# Altium PCB KeyFob.PcbDoc
Units mil, origin at the board's own origin, x right, y up, seen from the top; angles counter-clockwise.
Board outline 1385.83 x 1732.28 mil, 2 copper layers (Top Layer, Bottom Layer); 36 components, 19 nets, 110 pads, 40 vias.
Unrouted connection lines stored in the file: 31.
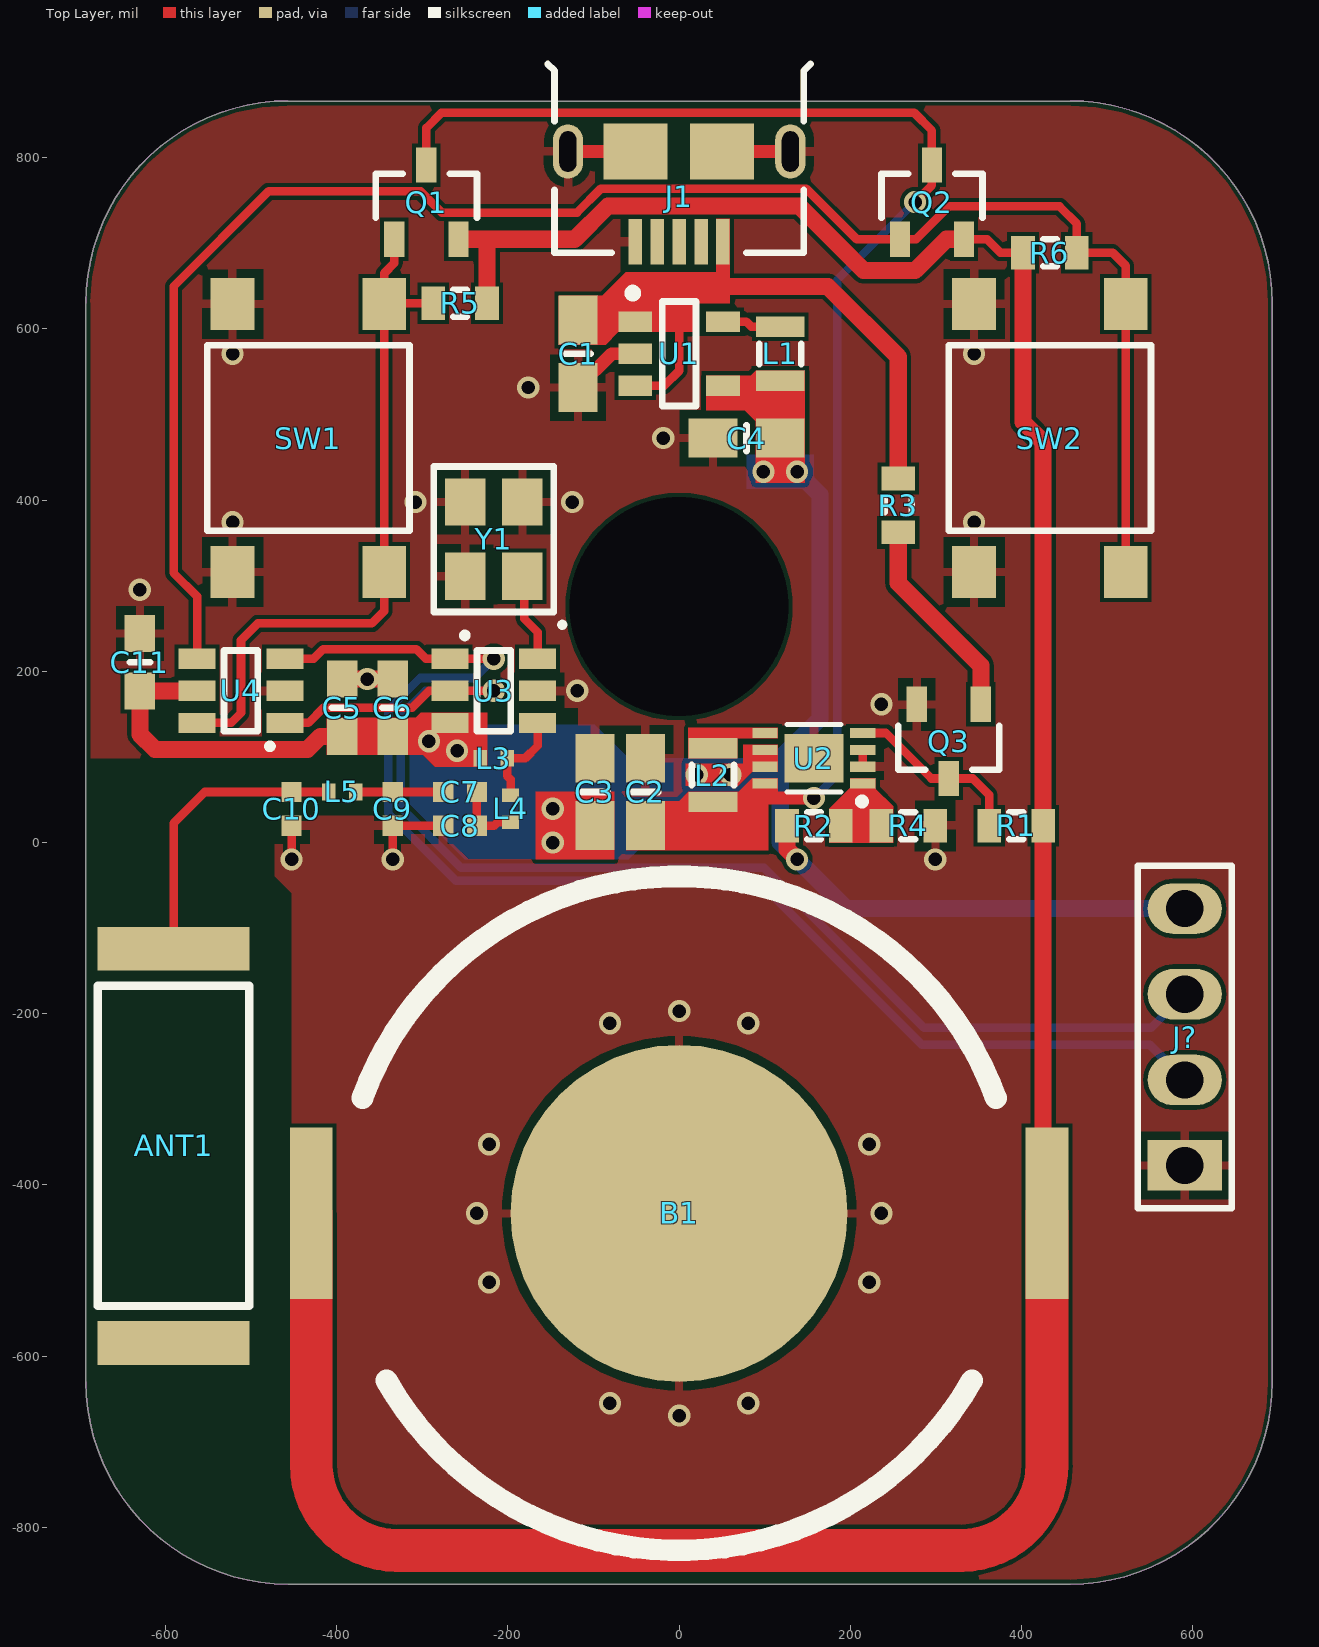
[diagram p0: Top Layer view]
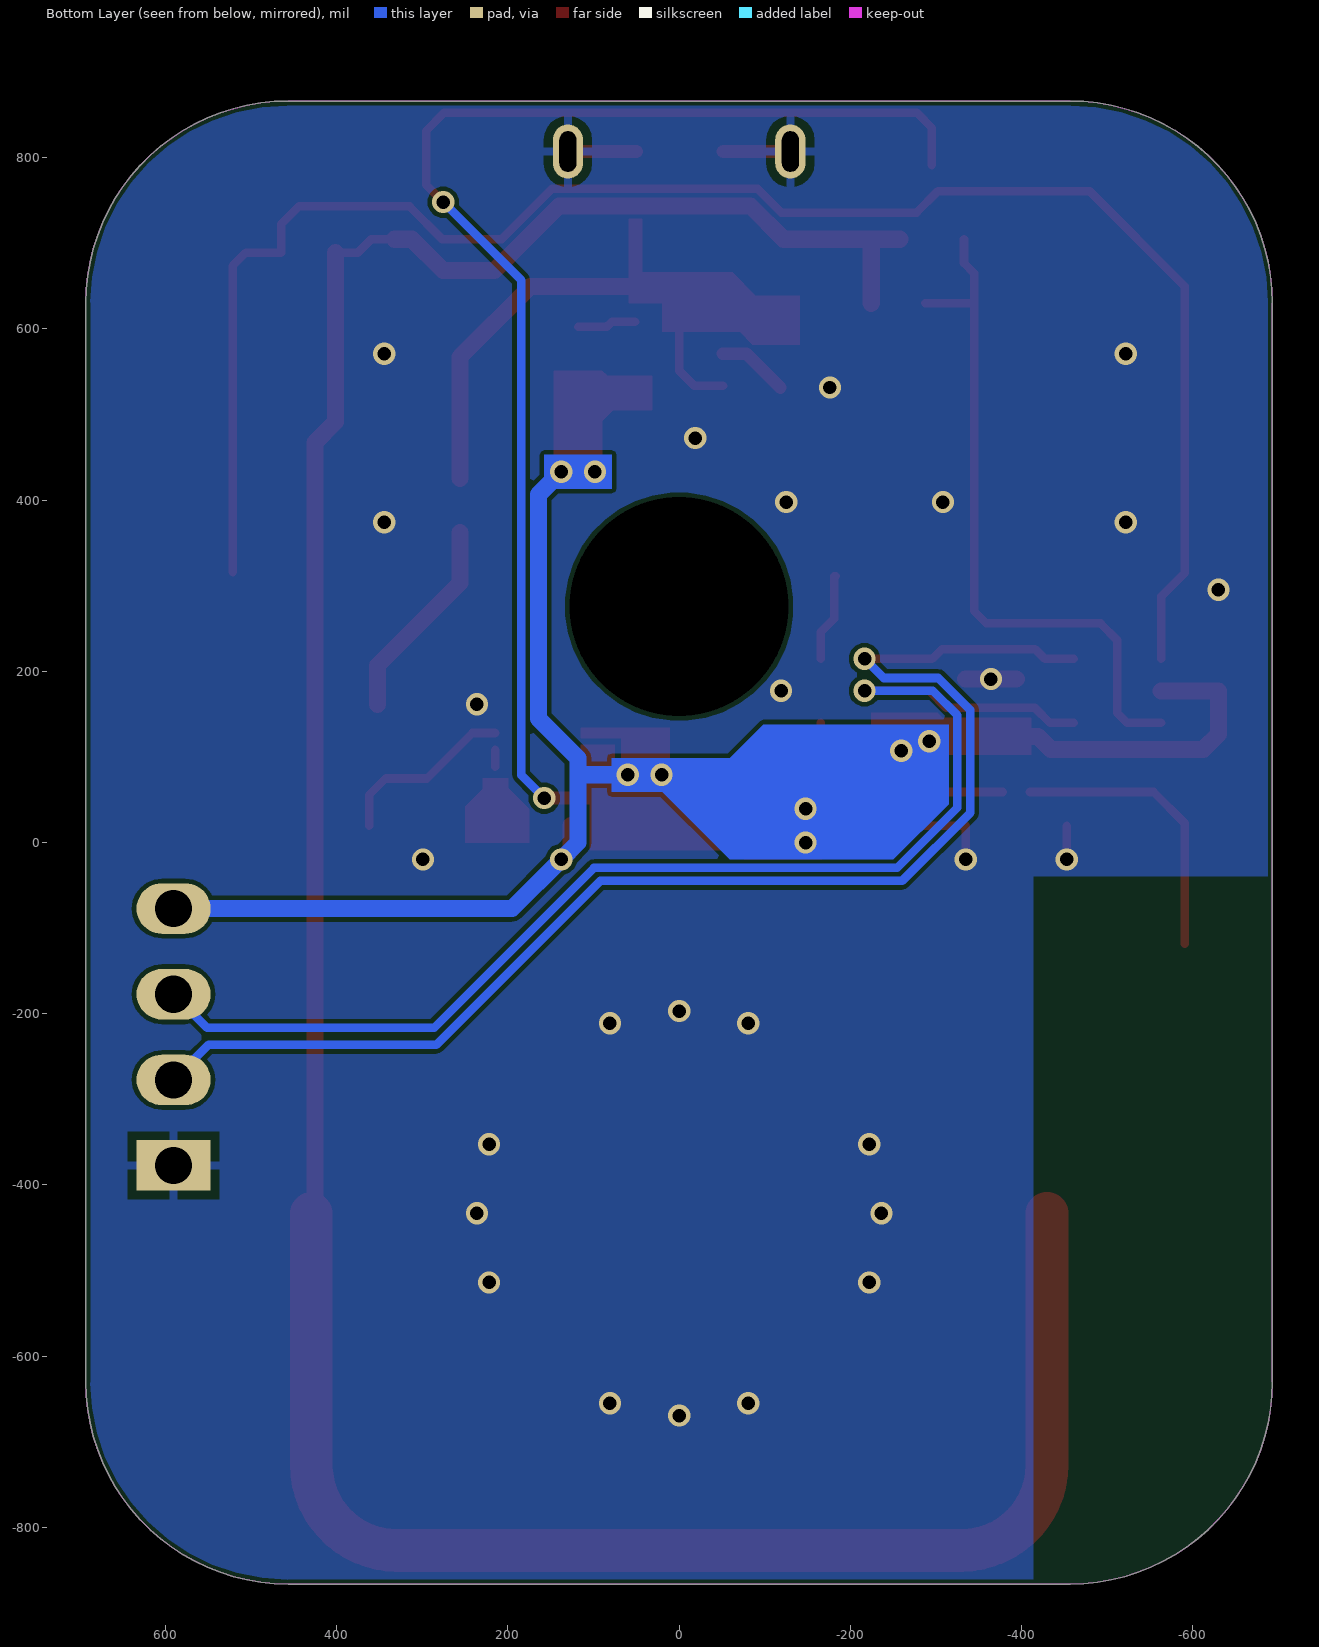
[diagram p1: Bottom Layer view, seen from below]
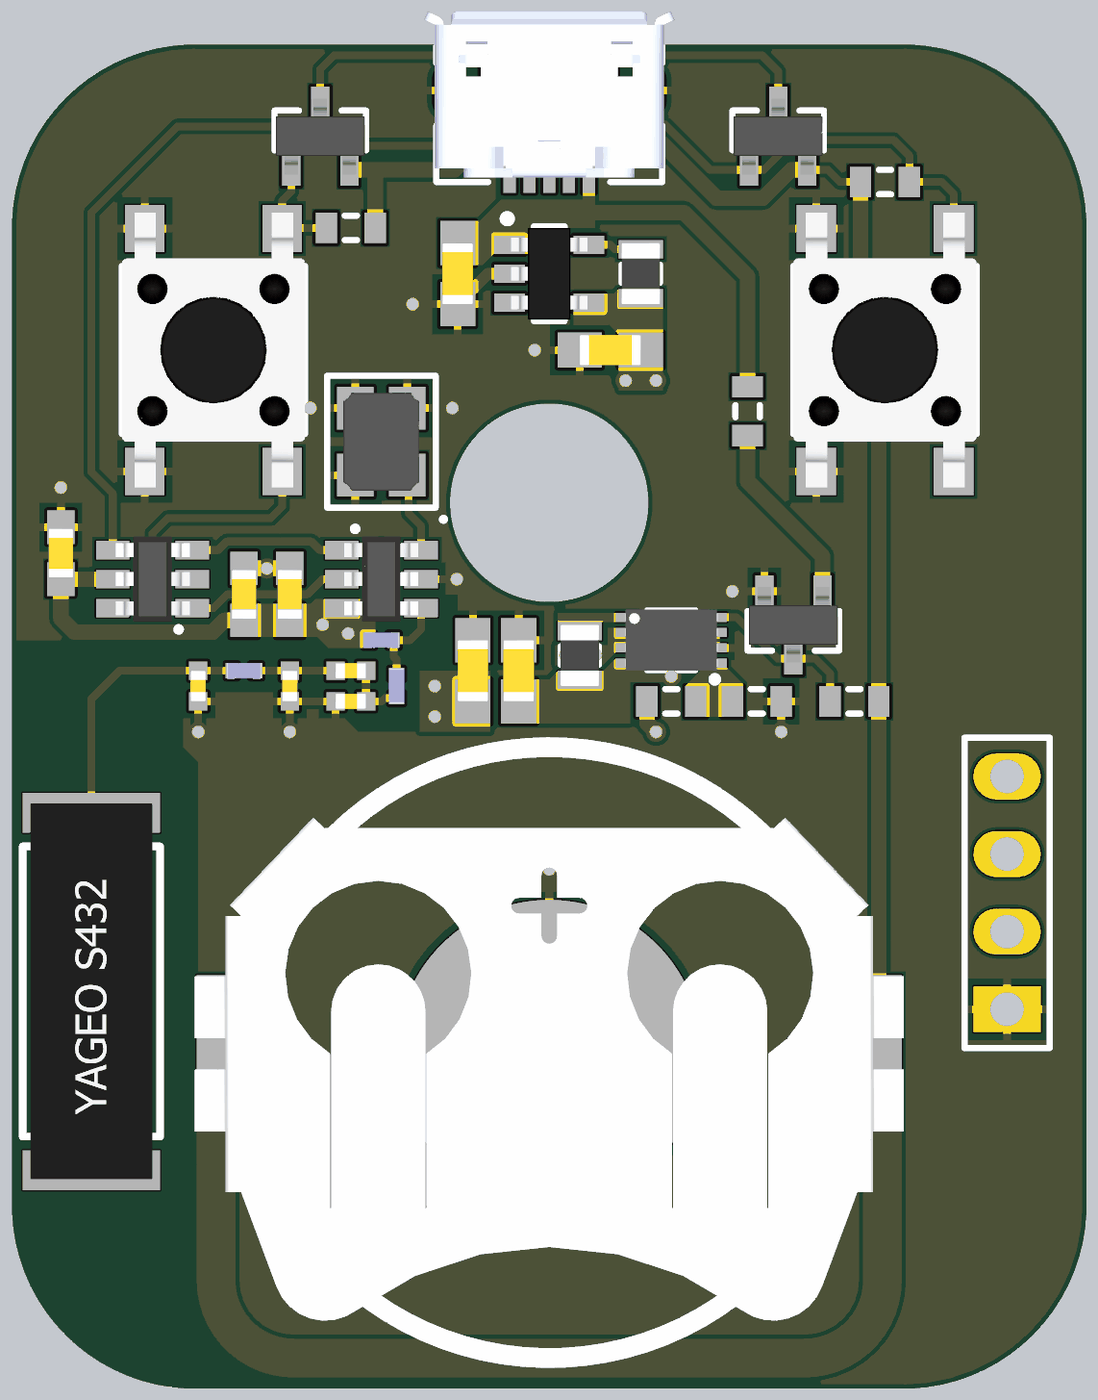
[diagram p2: 3D render of the assembled board from above, using the file's embedded part models]

## Layer stack, top to bottom
Top Solder: solder mask 0.4, Solder Resist, Dk 3.5
Top Layer: signal copper 1.4
Dielectric 1: dielectric 12.6, FR-4, Dk 4.8
Bottom Layer: signal copper 1.4
Bottom Solder: solder mask 0.4, Solder Resist, Dk 3.5

## Board outline
-692.91,-629.92 -692.91,629.92 cw(c-456.69,629.92) -456.69,866.14 456.69,866.14 cw(c456.69,629.92) 692.91,629.92 692.91,-629.92 cw(c456.69,-629.92) 456.69,-866.14 -456.69,-866.14 cw(c-456.69,-629.92)

## Design rules (kind name [scope] priority, off if disabled: settings)
Clearance [All] p1: gap=5 ignorepadtopadclearanceinfootprint=FALSE except(0: Arc-Hole Track-Hole SMDPad-Hole THPad-Hole Via-Hole Fill-Hole Poly-Hole Region-Hole Text-Hole)
PolygonConnect [All] p1: connectstyle=Relief reliefconductorwidth=10 reliefentries=4 polygonreliefangle="90 Angle" airgapwidth=10
RoutingVias [All] p1: holewidth=28 width=50 viastyle="Through Hole" minholewidth=28 minwidth=50 maxholewidth=28 maxwidth=50
SolderMaskExpansion [All] p1: expansion=4 istentingtop=FALSE
Width [All] p1: maxlimit=100 minlimit=5 preferedwidth=10
30 further rules are at their usual default settings.

## Components (designator, comment, footprint, x,y, rotation, side; value= is the part's Value field where it differs from the comment)
ANT1 "433MHz" Ant,Chip,SMD -590.55,-354.33 r270 top
B1 "CR2032" Holder,Cell,CR2032,PCB,SMD 0,-433.07 r180 top locked
C1 "10uF" Cap,SMD,0805 -118.11,570.87 r90 top
C2 "10uF" Cap,SMD,0805 -39.37,59.06 r270 top
C3 "10uF" Cap,SMD,0805 -98.43,59.06 r270 top
C4 "10uF" Cap,SMD,0805 78.74,472.44 r0 top
C5 "4.7nF" Cap,SMD,0603 -393.7,157.48 r270 top
C6 "470pF" Cap,SMD,0603 -334.65,157.48 r270 top
C7 "5.6pF" Cap,SMD,0402 -255.9,59.06 r0 top
C8 "6.8pF" Cap,SMD,0402 -255.9,19.69 r0 top
C9 "8.2pF" Cap,SMD,0402 -334.65,39.37 r90 top
C10 "8.2pF" Cap,SMD,0402 -452.76,39.37 r90 top
C11 "100nF" Cap,SMD,0603 -629.92,210.63 r270 top
J1 "USB" CONN,USB,MICROB,SMD 0,807.09 r180 top
J? "Term,Header,4 Pin,Top,2.54mm" Term,Header,4Pin,2.54mm 590.55,-277.17 r90 top
L1 "4.7uH" IND,0805 118.11,570.87 r270 top
L2 "4.7uH" IND,0805 39.37,78.74 r90 top
L3 "330nH" ind,0402 -216.54,98.43 r0 top
L4 "22nH" ind,0402 -196.85,39.37 r270 top
L5 "18nH" ind,0402 -393.7,59.06 r180 top
Q1 "FDN340P" SOT23-3 -295.28,748.03 r90 top
Q2 "FDN340P" SOT23-3 295.28,748.03 r90 top
Q3 "MMBT3904LT1G" SOT23-3 314.96,118.11 r270 top
R1 "10k" RES,0603 393.7,19.68 r0 top
R2 "976k" RES,0603 157.48,19.68 r0 top
R3 "10k" RES,0603 255.91,393.7 r270 top
R4 "562k" RES,0603 267.72,19.68 r180 top
R5 "10k" RES,0603 -255.91,629.92 r180 top
R6 "10k" RES,0603 433.07,688.98 r0 top
SW1 "Switch" Switch,Tactile,SPST-NO,SMD -433.07,472.44 r90 top
SW2 "Switch" Switch,Tactile,SPST-NO,SMD 433.07,472.44 r90 top
U1 "TPS62203DBVR" SOT23-5 0,570.87 r0 top
U2 "MCP1640" IC,DFN,2x3mm,P0.5,SMD 157.48,98.43 r180 top
U3 "MICR114" SOT23-6 -216.54,177.17 r0 top
U4 "ATTINY5" SOT23-6 -511.81,177.17 r180 top
Y1 "13.56MHz" "XTAL,SMD,4 Pin" -216.54,354.33 r90 top

## Footprints (in the part's own frame and the unit in brackets; to place one, negate y for a bottom-side part, rotate by r counter-clockwise, add the part's x,y. Pads: shape width x height; smd on the part's side, far side on the other; paste and mask are expansions set on the pad)
Ant,Chip,SMD [mm] "PulseLarsen Antennas ANT1204F002R0433A"
  rect 1.3x4.5 smd mask+0.05: 0(5.85,0) 1(-5.85,0)
  silkscreen extent -4.75,-2.25 4.75,2.25, body extent -6.15,-2 6.15,2, height 1.6
Cap,SMD,0402 [mm] "KEMET C0402C100K5GACTU"
  rect 0.6x0.6 smd: 1(-0.5,0) 2(0.5,0)
  body extent -0.5,-0.25 0.5,0.25, height 0.5
Cap,SMD,0603 [mm] "KEMET C0603C104Z3VACTU"
  rect 1.1x0.9 smd: 1(-0.85,0) 2(0.85,0)
  silkscreen extent 0,-0.3 0,0.3, body extent -0.8,-0.4 0.8,0.4, height 0.5
Cap,SMD,0805 [mm] "KEMET C0805C102K5RACTU"
  rect 1.45x1.15 smd: 1(-1,0) 2(1,0)
  silkscreen extent 0,-0.38 0,0.38, body extent -1,-0.5 1,0.5, height 1.2
CONN,USB,MICROB,SMD [mm] "Amphenol ICC 10118193-0001LF"
  rrect100% 0.9x1.6 hole 1.2 slot 0.5 at 0 deg: 0(-3.3,0) 0(3.3,0)
  rect 1.9x1.651 smd: 0(-1.27,0) 0(1.3,0)
  rect 0.4x1.35 smd: 1(-1.3,2.675) 2(-0.65,2.675) 3(0,2.675) 4(0.65,2.675) 5(1.3,2.675)
  silkscreen extent -3.9,-2.6 3.9,3, body extent -4.1,-2.58 4.1,2.85, height 2.68
Holder,Cell,CR2032,PCB,SMD [mm] "Adam Tech BH-67A-5"
  rect 1.27x5.08 smd mask+0.05: 1(-10.915,0) 1(10.915,0)
  round 10 smd mask+0.05: 2(0,0)
  silkscreen extent -9.4,-10 9.4,10, body extent -11.62,-7.7 11.62,8.78, height 4.05
IC,DFN,2x3mm,P0.5,SMD [mm] "Microchip MCP1640"
  rect 0.75x0.3 smd mask+0.05: 1(-1.45,0.75) 2(-1.45,0.25) 3(-1.45,-0.25) 4(-1.45,-0.75) 5(1.45,-0.75) 6(1.45,-0.25) 7(1.45,0.25) 8(1.45,0.75)
  rect 1.75x1.45 smd mask+0.05: 9(0,0)
  silkscreen extent -1.51,-1 0.8,1.36, body extent -1.52,-1.01 1.52,0.99, height 0.9
ind,0402 [mm] "Murata LQW15AN9N1G00D"
  rect 0.4x0.5 smd: 1(-0.4,0) 2(0.4,0)
  body extent -0.56,-0.26 0.56,0.26, height 0.65
IND,0805 [mm] "Taiyo Yuden LBR2012T100K"
  rect 0.6x1.45 smd mask+0.05: 1(-0.8,0) 2(0.8,0)
  silkscreen extent -0.3,-0.63 0.3,0.63, body extent -1,-0.62 1,0.63, height 0.49
RES,0603 [mm] "Yageo RC0603FR-0710KL"
  rect 0.7x1 smd: 1(-0.8,0) 2(0.8,0)
  silkscreen extent -0.2,-0.4 0.2,0.4, body extent -0.8,-0.4 0.8,0.4, height 0.45
SOT23-3 [mm] "Texas Instruments TL431BIDBZR"
  rect 1.05x0.6 smd: 1(-1.1,0.95) 2(-1.1,-0.95) 3(1.1,0)
  silkscreen extent -0.46,-1.5 0.84,1.5, body extent -1.25,-1.46 1.23,1.46, height 1
SOT23-5 [mm] "Texas Instruments TPS62203DBVR"
  rect 1x0.6 smd: 1(-1.3,0.95) 2(-1.3,0) 3(-1.3,-0.95) 4(1.3,-0.95) 5(1.3,0.95)
  silkscreen extent -1.5,-1.55 0.5,1.92, body extent -1.25,-1.5 1.25,1.5, height 1.11
SOT23-6 [mm] "Texas Instruments SN74LVC1G18DBVR"
  rect 1.1x0.6 smd mask+0.05: 1(-1.3,0.95) 2(-1.3,0) 3(-1.3,-0.95) 4(1.3,-0.95) 5(1.3,0) 6(1.3,0.95)
  silkscreen extent -0.9,-1.2 0.5,1.69, body extent -1.22,-1.4 1.2,1.4, height 1.09
Switch,Tactile,SPST-NO,SMD [mm] "C&K PTS645SK43SMTR92 LFS"
  rect 1.55x1.3 smd mask+0.05: 1(-3.975,2.25) 2(3.975,2.25) 3(-3.975,-2.25) 4(3.975,-2.25)
  silkscreen extent -2.75,-3 2.75,3, body extent -4.5,-3 4.5,3, height 4.3
Term,Header,4Pin,2.54mm [mm] "Amphenol ICC 10082627-404HLF"
  rect 1.5x2.2 hole 1.1 mask+0.05: 1(-2.54,0)
  oval 1.5x2.2 hole 1.1 mask+0.05: 2(0,0) 3(2.54,0) 4(5.08,0)
  silkscreen extent -3.81,-1.4 6.35,1.4
"XTAL,SMD,4 Pin" [mm] "Abracon ABM8G-12.000MHZ-4Y-T3"
  rect 1.4x1.2 smd: 1(-1.1,-0.85) 2(1.1,-0.85) 3(1.1,0.85) 4(-1.1,0.85)
  silkscreen extent -2.59,-2.08 2.16,1.78, body extent -1.6,-1.24 1.6,1.24, height 0.99

## Part data
ANT1: library part Ant,433MHz,Chip,SMD, "433MHz - Chip RF Antenna 419MHz ~ 447MHz 0.79dBi Solder Surface Mount", Manufacturer=Yageo, Manufacturer Part Number=ANT1204F002R0433A, Vendor Part Number=311-1570-1-ND, CreatedBy="Judd Foster", HelpURL=https://www.yageo.com/upload/media/product/productsearch/datasheet/wireless/An_SMD_UHF_433_1204_0.pdf, Vendor=Digikey
B1: library part Holder,Cell,CR2032,PCB,SMD, "Battery Retainer Coin, 20.0mm 1 Cell SMD (SMT) Tab", Manufacturer="Keystone Electronics", Manufacturer Part Number=3034, Vendor Part Number=36-3034-ND, CreatedBy="Judd Foster", HelpURL=https://www.keyelco.com/userAssets/file/M65p9.pdf, Vendor=Digikey
C1 C2 C3 C4: library part CAP,Cer,10uF,10VDC,X5R,0805, "CAP CER 10UF 10V X5R 0805", Manufacturer=KEMET, Manufacturer Part Number=C0805C106K8PACTU, Vendor Part Number=399-4925-1-ND, CreatedBy="Judd Foster", HelpURL=https://content.kemet.com/datasheets/KEM_C1006_X5R_SMD.pdf, Vendor=Digikey
C5: library part CAP,Cer,4.7nF,50VDC,X7R,0603, "CAP CER 4700PF 50V X7R 0603", Manufacturer=KEMET, Manufacturer Part Number=C0603C472K5RACTU, Vendor Part Number=399-1087-1-ND, CreatedBy="Judd Foster", HelpURL=https://content.kemet.com/datasheets/KEM_C1002_X7R_SMD.pdf, Vendor=Digikey
C6: library part CAP,Cer,470pF,100VDC,X7R,0603, "470 pF ±10% 100V Ceramic Capacitor X7R 0603 (1608 Metric)", Manufacturer="AVX Corporation", Manufacturer Part Number=06031C471K4T2A, Vendor Part Number=478-9373-1-ND, CreatedBy="Judd Foster", HelpURL=https://datasheets.avx.com/AutoMLCC.pdf, Vendor=Digikey
C7: library part CAP,Cer,5.6pF,50VDC,C0G/NP0,0402, "5.6 pF ±0.1pF 50V Ceramic Capacitor C0G, NP0 0402 (1005 Metric)", Manufacturer="AVX Corporation", Manufacturer Part Number=04025A5R6BAT2A, Vendor Part Number=478-11363-1-ND, CreatedBy="Judd Foster", HelpURL=https://datasheets.avx.com/C0GNP0-Dielectric.pdf, Vendor=Digikey
C8: library part CAP,Cer,6.8pF,50VDC,C0G/NP0,0402, "±0.05pF 50V Ceramic Capacitor C0G, NP0 0402 (1005 Metric)", Manufacturer="Murata Electronics", Manufacturer Part Number=GJM1555C1H6R8WB01D, Vendor Part Number=490-14447-1-ND, CreatedBy="Judd Foster", HelpURL=https://search.murata.co.jp/Ceramy/image/img/A01X/G101/ENG/GJM1555C1H6R8WB01-01.pdf, Vendor=Digikey
C9 C10: library part CAP,Cer,8.2pF,50VDC,C0G/NP0,0402_1, "8.2 pF ±0.05pF 50V Ceramic Capacitor C0G, NP0 0402 (1005 Metric)", Manufacturer="Murata Electronics", Manufacturer Part Number=GJM1555C1H8R2WB01D, Vendor Part Number=490-11241-1-ND, CreatedBy="Judd Foster", HelpURL=https://search.murata.co.jp/Ceramy/image/img/A01X/G101/ENG/GJM1555C1H8R2WB01-01.pdf, Vendor=Digikey
C11: library part CAP,Cer,100nF,25VDC,Y5V,0603, "CAP CER 0.1UF 25V Y5V 0603", Manufacturer=KEMET, Manufacturer Part Number=C0603C104Z3VACTU, Vendor Part Number=399-1100-1-ND, CreatedBy="Judd Foster", HelpURL=https://content.kemet.com/datasheets/KEM_C1005_Y5V_SMD.pdf, Vendor=Digikey
J1: library part Conn,USB.Micro_B,SMD, "USB - micro B USB 2.0 Receptacle Connector 5 Position Surface Mount, Right Angle; Through Hole", Manufacturer="Amphenol ICC (FCI)", Manufacturer Part Number=10118193-0001LF, Vendor Part Number=609-4616-1-ND, CreatedBy="Judd Foster", HelpURL=https://cdn.amphenol-icc.com/media/wysiwyg/files/documentation/datasheet/inputoutput/io_usb_micro.pdf, Vendor=Digikey
J?: "Connector Header Through Hole 4 position 0.100\" (2.54mm)", Manufacturer="Amphenol ICC (FCI)", Manufacturer Part Number=10082627-404HLF, Vendor Part Number=609-10082627-404HLF-ND, Created By="Judd Foster", HelpURL=https://cdn.amphenol-icc.com/media/wysiwyg/files/drawing/10082627.pdf, Vendor=Digikey
L1 L2: library part IND,4.7uH,80mA,Multilayer,0805, "4.7 µH Shielded Multilayer Inductor 80 mA 300mOhm 0805 (2012 Metric)", Manufacturer="TDK Corporation", Manufacturer Part Number=MLZ2012E4R7MT000, Vendor Part Number=445-3169-1-ND, CreatedBy="Judd Foster", HelpURL=https://product.tdk.com/en/system/files?file=dam/doc/product/inductor/inductor/smd/catalog/inductor_commercial_decoupling_mlz2012_en.pdf, Vendor=Digikey
L3: library part IND,330nH,300mA,Multilayer,0402, "330 nH Shielded Multilayer Inductor 300 mA 600mOhm Max 0402 (1005 Metric)", Manufacturer="Murata Electronics", Manufacturer Part Number=LQB15NNR33M10D, Vendor Part Number=490-17863-1-ND, CreatedBy="Judd Foster", HelpURL=https://search.murata.co.jp/Ceramy/image/img/P02/JELF243B-0045.pdf, Vendor=Digikey
L4: library part IND,22nH,800mA,Wirewound,0402, "22 nH Unshielded Wirewound Inductor 800 mA 160mOhm 0402 (1005 Metric) -", Manufacturer="Delta Electronics/Components", Manufacturer Part Number=0402HP-220EGTS, Vendor Part Number=2035-1087-1-ND, CreatedBy="Judd Foster", HelpURL=https://www.deltaww.com/filecenter/Products/download/04/0402/0402HP.pdf, Vendor=Digikey
L5: library part IND,18nH,370mA,Wirewound,0402, "18 nH Unshielded Wirewound Inductor 370 mA 270mOhm 0402 (1005 Metric) -", Manufacturer="Delta Electronics/Components", Manufacturer Part Number=0402HM-180EGTS, Vendor Part Number=2035-1047-1-ND, CreatedBy="Judd Foster", HelpURL=https://filecenter.deltaww.com/Products/download/04/0402/0402HM.pdf, Vendor=Digikey
Q1 Q2: library part "MOSFET,P Ch,20V,2A", "P-Channel 20V 2A (Ta) 500mW (Ta) Surface Mount SuperSOT-3", Manufacturer="ON Semiconductor", Vendor Part Number=FDN340PCT-ND, CreatedBy="Judd Foster", HelpURL=https://www.onsemi.com/pub/Collateral/FDN340P-D.PDF, Manufacturer Part Number=FDN340P, Vendor=Digikey
Q3: library part Trans,NPN,40V,200mA,SMD, "TRANS NPN 40V 0.2A SOT23", Manufacturer="ON Semiconductor", Vendor Part Number=MMBT3904LT1GOSCT-ND, CreatedBy="Judd Foster", HelpURL=https://www.onsemi.com/pub/Collateral/MMBT3904LT1-D.PDF, Manufacturer Part Number=MMBT3904LT1G, Vendor=Digikey
R1 R3 R5 R6: library part RES,10k,1%,0.1W,0603, "RES SMD 10K OHM 1% 1/10W 0603", Manufacturer=Yageo, Manufacturer Part Number=RC0603FR-0710KL, Vendor Part Number=311-10.0KHRCT-ND, CreatedBy="Judd Foster", HelpURL=https://www.yageo.com/upload/media/product/productsearch/datasheet/rchip/PYu-RC_Group_51_RoHS_L_10.pdf, Vendor=Digikey
R2: library part RES,976k,1%,0.1W,0603, "976 kOhms ±1% 0.1W, 1/10W Chip Resistor 0603 (1608 Metric) Automotive AEC-Q200 Thick Film", Manufacturer="Stackpole Electronics Inc", Manufacturer Part Number=RMCF0603FT976K, Vendor Part Number=RMCF0603FT976KCT-ND, CreatedBy="Judd Foster", HelpURL=https://www.seielect.com/catalog/sei-rmcf_rmcp.pdf, Vendor=Digikey
R4: library part RES,562k,1%,0.1W,0603, "562 kOhms ±1% 0.1W, 1/10W Chip Resistor 0603 (1608 Metric) Automotive AEC-Q200 Thick Film", Manufacturer="Stackpole Electronics Inc", Manufacturer Part Number=RMCF0603FT562K, Vendor Part Number=RMCF0603FT562KCT-ND, CreatedBy="Judd Foster", HelpURL=https://www.seielect.com/catalog/sei-rmcf_rmcp.pdf, Vendor=Digikey
SW1 SW2: library part Switch,Tactile,SPST-NO,SMD,H5.0, "Tactile Switch SPST-NO Top Actuated Surface Mount", Manufacturer=C&K, Manufacturer Part Number="PTS645SK50SMTR92 LFS", Vendor Part Number=CKN9087CT-ND, CreatedBy="Judd Foster", HelpURL=https://dznh3ojzb2azq.cloudfront.net/products/Tactile/PTS645/documents/datasheet.pdf, Vendor=Digikey
U1: "IC REG BUCK 3.3V 300MA SOT23-5", Manufacturer="Texas Instruments", Vendor Part Number=296-39452-1-ND, CreatedBy="Judd Foster", HelpURL=http://www.ti.com/lit/ds/symlink/tps62203.pdf, Manufacturer Part Number=TPS62203DBVR, Vendor=Digikey
U2: library part MCP1640CT-I/MC, "AVR series Microcontroller IC 8-Bit 12MHz 512B (256 x 16) FLASH SOT-23-6", Manufacturer="Microchip Technology", Vendor Part Number=MCP1640CT-I/MCCT-ND, CreatedBy="Judd Foster", HelpURL=https://ww1.microchip.com/downloads/en/DeviceDoc/20002234D.pdf, Manufacturer Part Number=MCP1640CT-I/MC, Vendor=Digikey
U3: library part MICRF114T-I/OT, "RF Transmitter - 285MHz ~ 445MHz 13dBm 115.2kbps - Antenna SOT-23-6", Manufacturer=Microchip, Vendor Part Number=MICRF114T-I/OTCT-ND, CreatedBy="Judd Foster", HelpURL=https://ww1.microchip.com/downloads/en/DeviceDoc/50002416A.pdf, Manufacturer Part Number=MICRF114T-I/OT, Vendor=Digikey
U4: library part ATTINY5-TSHR, "AVR series Microcontroller IC 8-Bit 12MHz 512B (256 x 16) FLASH SOT-23-6", Manufacturer="Microchip Technology", Vendor Part Number=ATTINY5-TSHRCT-ND, CreatedBy="Judd Foster", HelpURL=https://ww1.microchip.com/downloads/en/DeviceDoc/Atmel-8127-AVR-8-bit-Microcontroller-ATtiny4-ATtiny5-ATtiny9-ATtiny10_Datasheet-Summary.pdf, Manufacturer Part Number=ATTINY5-TSHR, Vendor=Digikey
Y1: library part XTAL,13.56MHz,18pF,SMD, "±20ppm Crystal 18pF 4-SMD, No Lead", Manufacturer="NDK America, Inc.", Manufacturer Part Number=NX3225SA-13.56M-STD-CSR-3, Vendor Part Number=644-1235-1-ND, CreatedBy="Judd Foster", HelpURL=https://media.digikey.com/pdf/Data%20Sheets/NDK%20PDFs/NX3225SA_STD-CSR-3.pdf, Vendor=Digikey

## Free pads (board coordinates)
  round 0 hole 255.91 unplated mask+1.97: 0(0,275.59)

## Via types
v1: diameter 25.98, hole 15.75, Top Layer to Bottom Layer, tented both sides, 40 vias

## Nets (pads, with @x,y where several pads share a name; then routed paths per layer and width w, separated by ;. In a path a pad name is that pad's centre, name@x,y a point inside that pad or via, vN(x,y) a via of type N, cw(c..) or ccw(c..) an arc to the next point about the centre after c; other vN are vias at no path point)
3V3: C3.2 C4.2 C5.2 C6.2 C11.2 J?.4 L1.2 L3.1 R2.1 U1.4 U2.6 U2.7 U3.3 U4.5 | length 1437.6
  Top Layer w20: U4.5 C11.2 -629.92,126.51 -612.26,108.86 -434,108.86 -418.84,124.02 C5.2 ; R2.1 125.98,-7.87 v1(137.8,-19.68)
  Bottom Layer w20: v1(59.95,79.22) 118.11,79.22 ; v1(137.8,433.07) 164.5,406.36 164.5,144.82 118.11,98.43 118.11,79.22 ; J?.4 195.28,-77.17 v1(137.8,-19.68) 118.11,0 118.11,79.22
  other v1: -147.64,0 -147.64,39.37 20.57,79.22 -259.41,107.1 -292.25,118.4 98.43,433.07
GND: B1.2 C1.1 C2.1 C3.1 C4.1 C5.1 C6.1 C8.1 C9.1 C10.1 C11.1 J1.0 J1.5 J?.1 Q3.2 R4.1 SW1.1 SW1.2 SW2.1 SW2.2 U1.2 U2.2 U2.3 U2.9 U3.5 U4.2 Y1.2 Y1.3 Y1.4 | length 458.4
  Top Layer w10: v1(-452.76,-19.68) C10.1 ; v1(-334.65,-19.68) C9.1 C8.1 ; U2.2 U2.3
  Top Layer w15: J1.0@-129.92,807.09 J1.0@-51.18,807.09 ; C1.1 -78.74,570.87 U1.2 ; J1.0@50,807.09 J1.0@129.92,807.09
  Top Layer w20: C5.1 v1(-364.17,190.94) C6.1
  other v1: 0,-669.29 -80.79,-655.05 80.79,-655.05 -221.97,-513.86 221.97,-513.86 -236.22,-433.07 236.22,-433.07 -221.97,-352.28 221.97,-352.28 -80.79,-211.1 80.79,-211.1 0,-196.85 299.21,-19.68 236.22,161.42 -119.09,177.17 -629.92,295.28 -521.65,374.02 344.49,374.02 -308.07,397.64 -125,397.64 -18.7,472.44 -176.18,531.5 -521.65,570.87 344.49,570.87
NetANT1_1: ANT1.1 C10.2 L5.2 | length 336.9
  Top Layer w10: ANT1.1@-590.55,-118.11 -590.55,22.62 -554.11,59.06 C10.2 L5.2
NetC2_2: C2.2 L2.1 Q1.3 Q2.3 U2.8 | length 1562.5
  Top Layer w10: Q1.3 -295.28,834.77 -277.72,852.33 274.5,852.33 295.28,831.56 Q2.3 295.28,767.72 v1(275.59,748.03)
  Top Layer w15: 81.6,51.89 v1(157.48,51.89)
  Bottom Layer w10: v1(157.48,51.89) 184.5,78.91 184.5,656.94 v1(275.59,748.03)
NetC7_1: C7.1 C9.2 L5.1 | length 102.4
  Top Layer w10: L5.1 C9.2 C7.1
NetC7_2: C7.2 C8.2 L4.2 | length 80.4
  Top Layer w10: C7.2 C8.2 -216.29,19.68 -212.35,23.62 L4.2
NetL1_1: L1.1 U1.5 | length 69.4
  Top Layer w10: U1.5 78.6,608.27 84.5,602.36 L1.1
NetL2_2: L2.2 U2.5
NetL3_2: L3.2 L4.1 U3.4 | length 113.3
  Top Layer w10: L4.1 -196.85,73.63 -200.79,77.57 L3.2 -179.74,98.43 -165.35,112.81 U3.4
NetQ3_1: Q3.1 R3.2 | length 240.7
  Top Layer w20: R3.2 255.91,303.16 352.36,206.71 Q3.1
NetR2_2: R2.2 R4.2 U2.1
NetU3_6: U3.6 Y1.1 | length 104.9
  Top Layer w10: Y1.1 -181.1,311.02 -181.1,261.56 -165.35,245.81 U3.6
SCK: J?.2 U3.1 U4.3 | length 1581.3
  Top Layer w10: U4.3 -427.09,214.57 -415.96,225.7 -306.92,225.7 -295.79,214.57 U3.1 v1(-216.54,214.57)
  Bottom Layer w10: v1(-216.54,214.57) -238.94,192.17 -302.62,192.17 -339.96,154.82 -339.96,59.06 -339.96,34.63 -260.65,-44.68 92.02,-44.68 283.55,-236.22 549.61,-236.22 J?.2
SDI: J?.3 U3.2 U4.1 | length 1526
  Top Layer w10: U4.1 -433.11,139.76 -415.39,157.48 -312.06,157.48 -292.38,177.17 U3.2 v1(-216.54,177.17)
  Bottom Layer w10: v1(-216.54,177.17) -296.41,177.17 -324.96,148.61 -324.96,84.44 -324.96,40.84 -254.43,-29.68 99.46,-29.68 286.31,-216.54 551.18,-216.54 J?.3
SW1: Q1.1 R5.2 SW1.3 SW1.4 U4.6 | length 819
  Top Layer w10: U4.6 -523.43,139.76 -511.81,151.38 -511.81,236.22 -492.13,255.91 -358.97,255.91 -344.49,270.38 SW1.3 SW1.4 ; Q1.1 -332.68,676.79 -344.49,664.98 SW1.4 ; R5.2 -343.5,629.92 SW1.4
SW2: Q2.1 R6.2 SW2.3 SW2.4 U4.4 | length 2072.9
  Top Layer w10: U4.4 -562.99,287.4 -590.55,314.96 -590.55,649.61 -479.49,760.67 -302.13,760.67 -277.27,735.81 -119.25,735.81 -91.5,763.55 -91.06,763.55 148.52,763.55 207.35,704.72 Q2.1 276.61,704.72 314.84,742.96 444.33,742.96 464.57,722.72 R6.2 506.36,688.98 521.65,673.68 SW2.4 SW2.3
VBATT: B1.1 Q1.2 Q2.2 R1.2 R5.1 R6.1 | length 3497.9
  Top Layer w10: Q2.2 359.6,704.72 375.35,688.98 R6.1
  Top Layer w20: Q1.2 -224.41,704.72 ; R5.1 -224.41,704.72 ; Q2.2 312.2,704.72 275.66,668.19 215.6,668.19 140.24,743.55 -83.22,743.55 -122.05,704.72 -216.54,704.72 -224.41,704.72 ; R6.1 401.57,491.07 425.2,467.45 R1.2 425.2,-39.37 425.2,-428.54 B1.1@429.72,-433.07
  Top Layer w50: B1.1@-429.72,-433.07 -429.72,-726.77 ccw(c-329.72,-726.77) -329.72,-826.77 329.72,-826.77 ccw(c329.72,-726.77) 429.72,-726.77 B1.1@429.72,-433.07
VBATT_EN: Q3.3 R1.1 U2.4 | length 212.5
  Top Layer w10: U2.4 241.45,127.95 294.6,74.8 Q3.3@314.02,74.8 ; Q3.3 342.9,74.8 362.2,55.49 R1.1
VUSB: C1.2 J1.1 R3.1 U1.1 U1.3 | length 562.3
  Top Layer w10: C1.2 C1.2@-116.14,608.27 ; U1.3 -17.72,533.46 0,551.18 0,608.27 U1.1
  Top Layer w20: 39.37,649.61 173.59,649.61 255.91,567.29 R3.1
pads on no net: ANT1.0 J1.2 J1.3 J1.4

## Polygon pours and split planes (outlines as drawn)
GND on Top Layer "NONET_L02_P-001" (solid, remove dead copper, pour order 0): -246.04,-19.68 -263.78,-1.94 -263.78,31.5 -464.56,31.5 -472.44,31.49 -472.44,-39.37 -452.76,-59.06 -452.76,-590.55 -708.66,-590.55 -708.66,-866.14 708.66,-866.14 708.66,866.14 -708.66,866.14 -708.66,98.43 -216.54,98.43 -216.54,157.48 -118.11,157.48 -118.11,-19.68
GND on Bottom Layer "NONET_L02_P-001" (solid, remove dead copper, pour order 1): -413.39,-39.37 -413.39,-866.14 708.66,-866.14 708.66,866.14 -708.66,866.14 -708.66,-39.37

## Keep-outs
Keep-Out Layer:
  the board outline again, w0.39

## Other copper
Top Layer:
  region net 3V3: -75.79,59.06 -167.31,59.06 -167.31,-19.68 -75.79,-19.68
  region net 3V3: 115.16,114.17 75.1,114.17 75.1,91.99 7.65,91.99 7.65,66.34 69.29,66.34 85.63,82.68 115.16,82.68
  region net 3V3: -224.41,88.58 -224.41,151.58 -302.04,151.58 -307.94,145.67 -411.42,145.67 -411.42,102.36 -299.21,102.36 -285.43,88.58
  region net NetL2_2: 115.16,122.05 67.91,122.05 67.91,98.43 10.83,98.43 10.83,133.86 115.16,133.86
  region net 3V3: 31.5,545.28 83.66,545.28 89.57,551.18 146.65,551.18 146.65,420.13 89.57,420.13 89.57,492.09 76.76,504.89 76.59,504.72 31.5,504.72
  region net VUSB: 19.69,596.46 19.69,629.92 59.06,629.92 59.06,728.35 43.31,728.35 43.31,666 -62.34,666 -89.57,638.78 -140.75,638.78 -140.75,581.69 -85.63,581.69 -70.87,596.46
  region net NetR2_2: 229.33,74.8 229.33,62.99 250,42.32 250,0 175.2,0 175.2,39.37 199.8,63.98 199.8,74.8
  region net NetC2_2: 85.63,74.8 69.88,59.06 10.83,59.06 0,48.23 -62.01,48.23 -62.01,-8.86 104.34,-8.86 104.34,46.83 115.16,46.83 115.16,74.8
Bottom Layer:
  region net 3V3: -314.96,44.98 -250.29,-19.68 -59.05,-19.68 19.69,59.06 78.74,59.06 78.74,98.43 -59.06,98.43 -98.43,137.8 -314.96,137.8
  region net 3V3: 78.74,452.76 78.74,413.39 157.48,413.39 157.48,452.76